# Altium PCB etapa_3.PcbDoc
Units mm, origin at the board's own origin, x right, y up, seen from the top; angles counter-clockwise.
Board outline 39 x 30.7 mm, 4 copper layers (Top Layer, Pot, S1, Bottom Layer); 129 components, 71 nets, 323 pads, 46 vias.
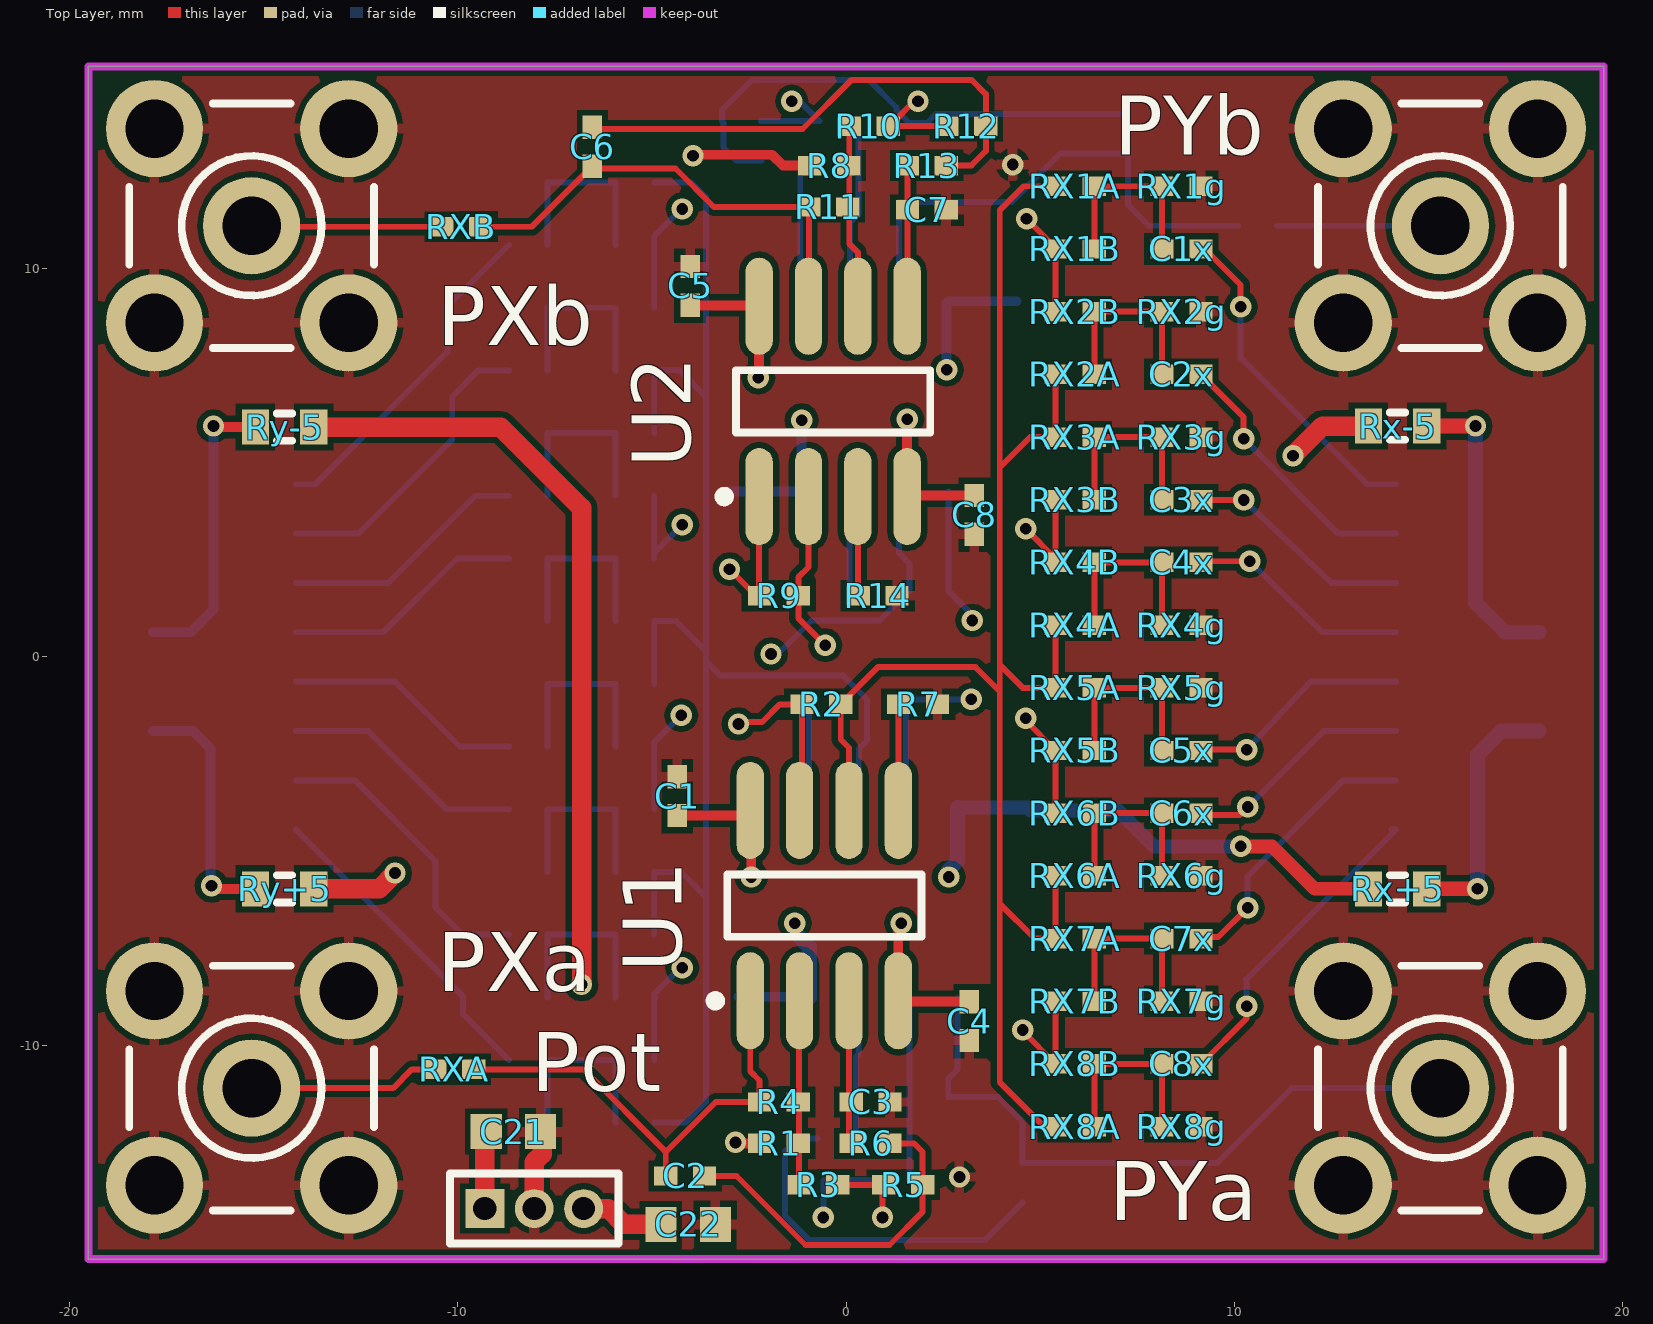
[diagram p0: Top Layer view]
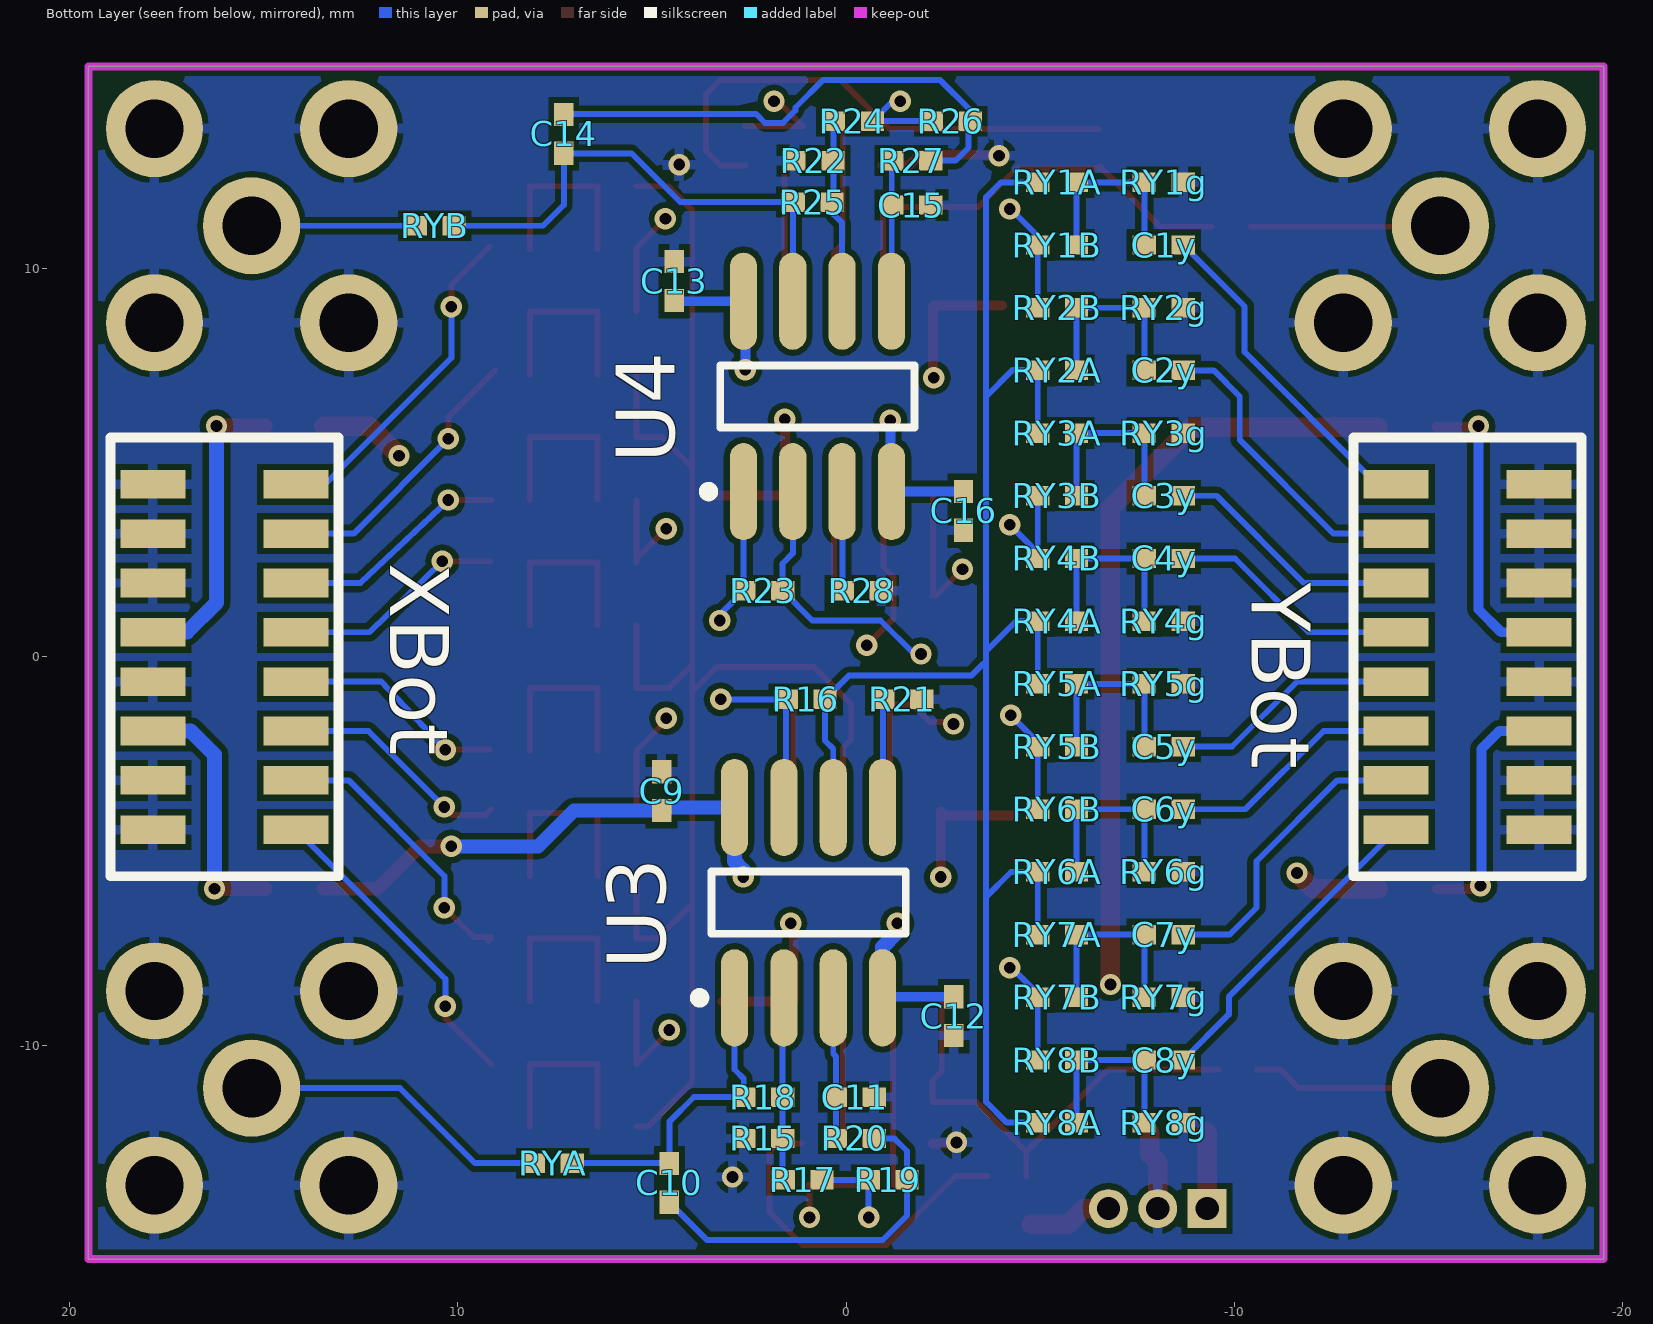
[diagram p1: Bottom Layer view, seen from below]
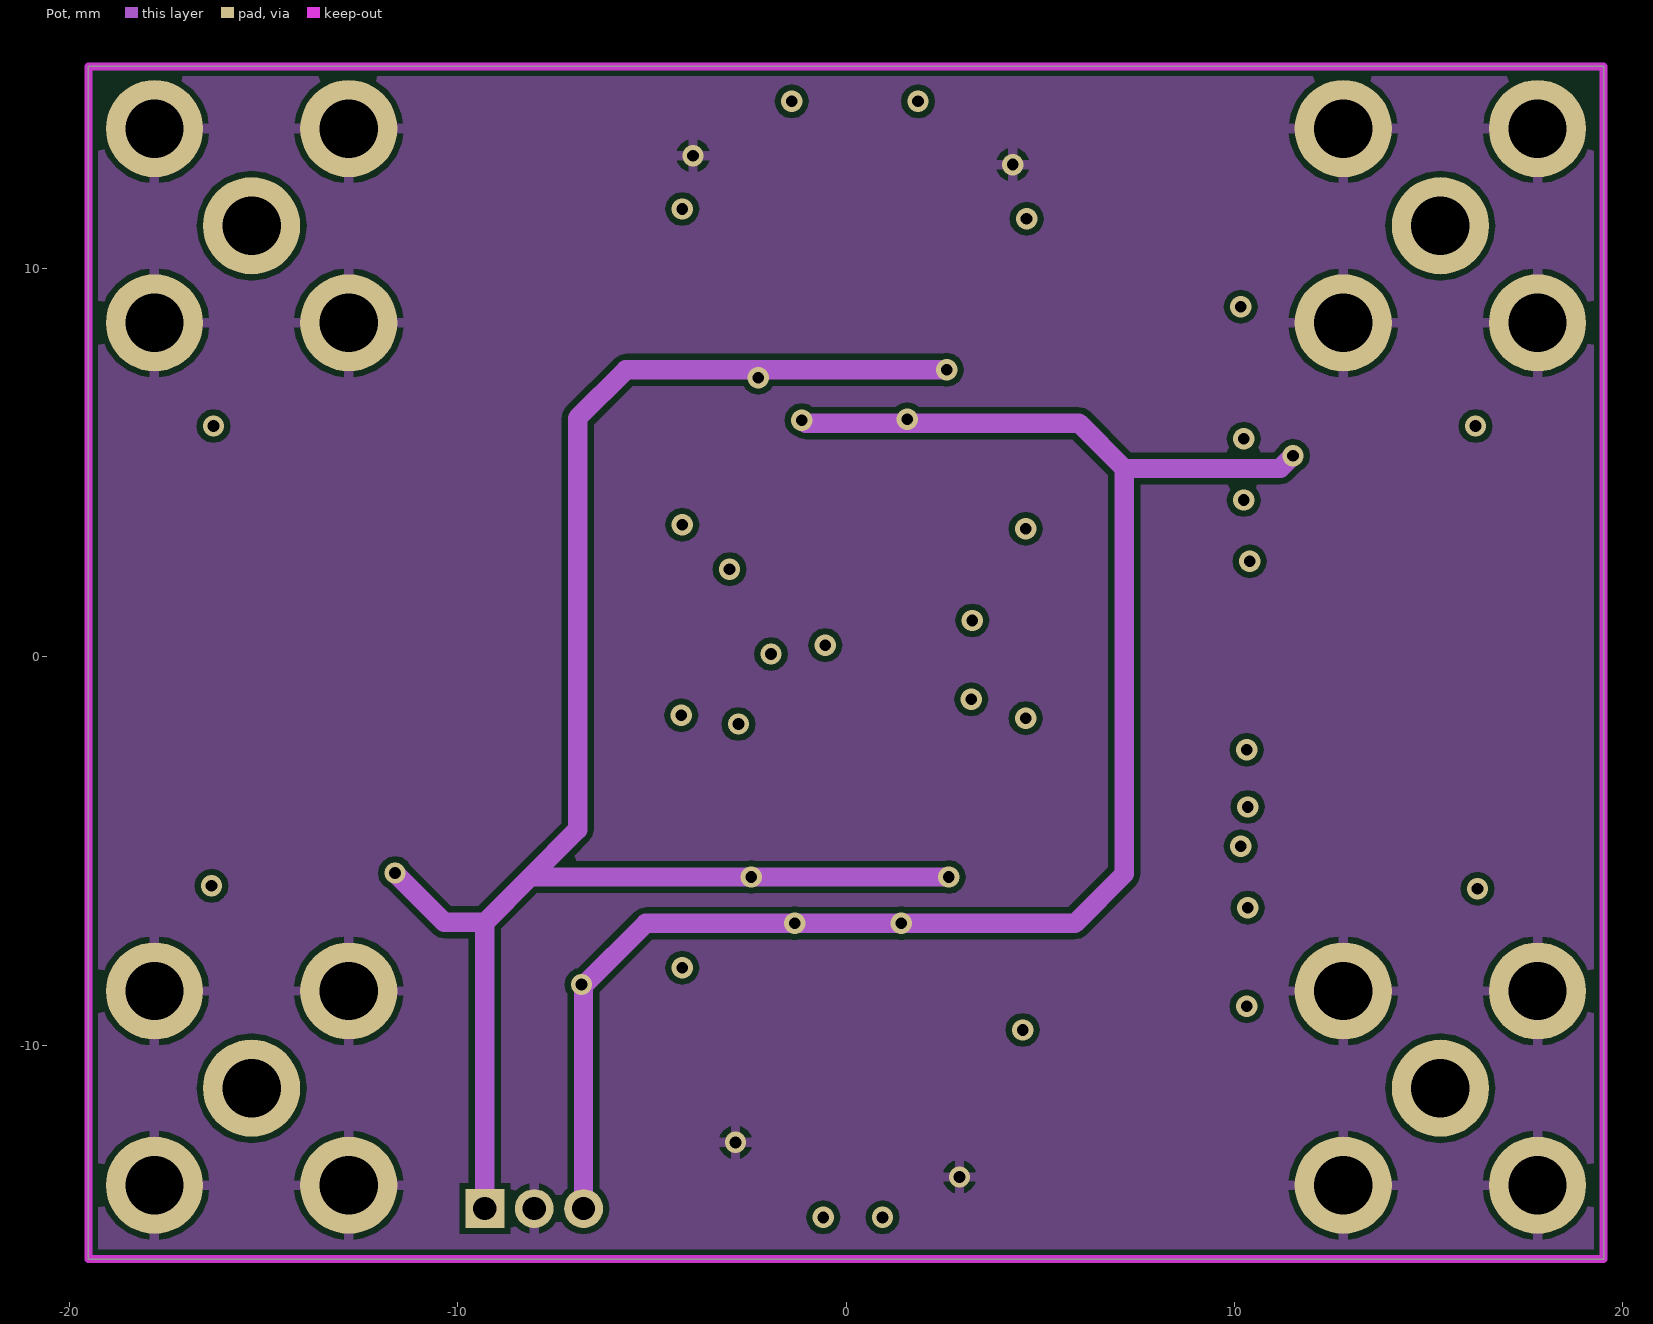
[diagram p2: Pot]
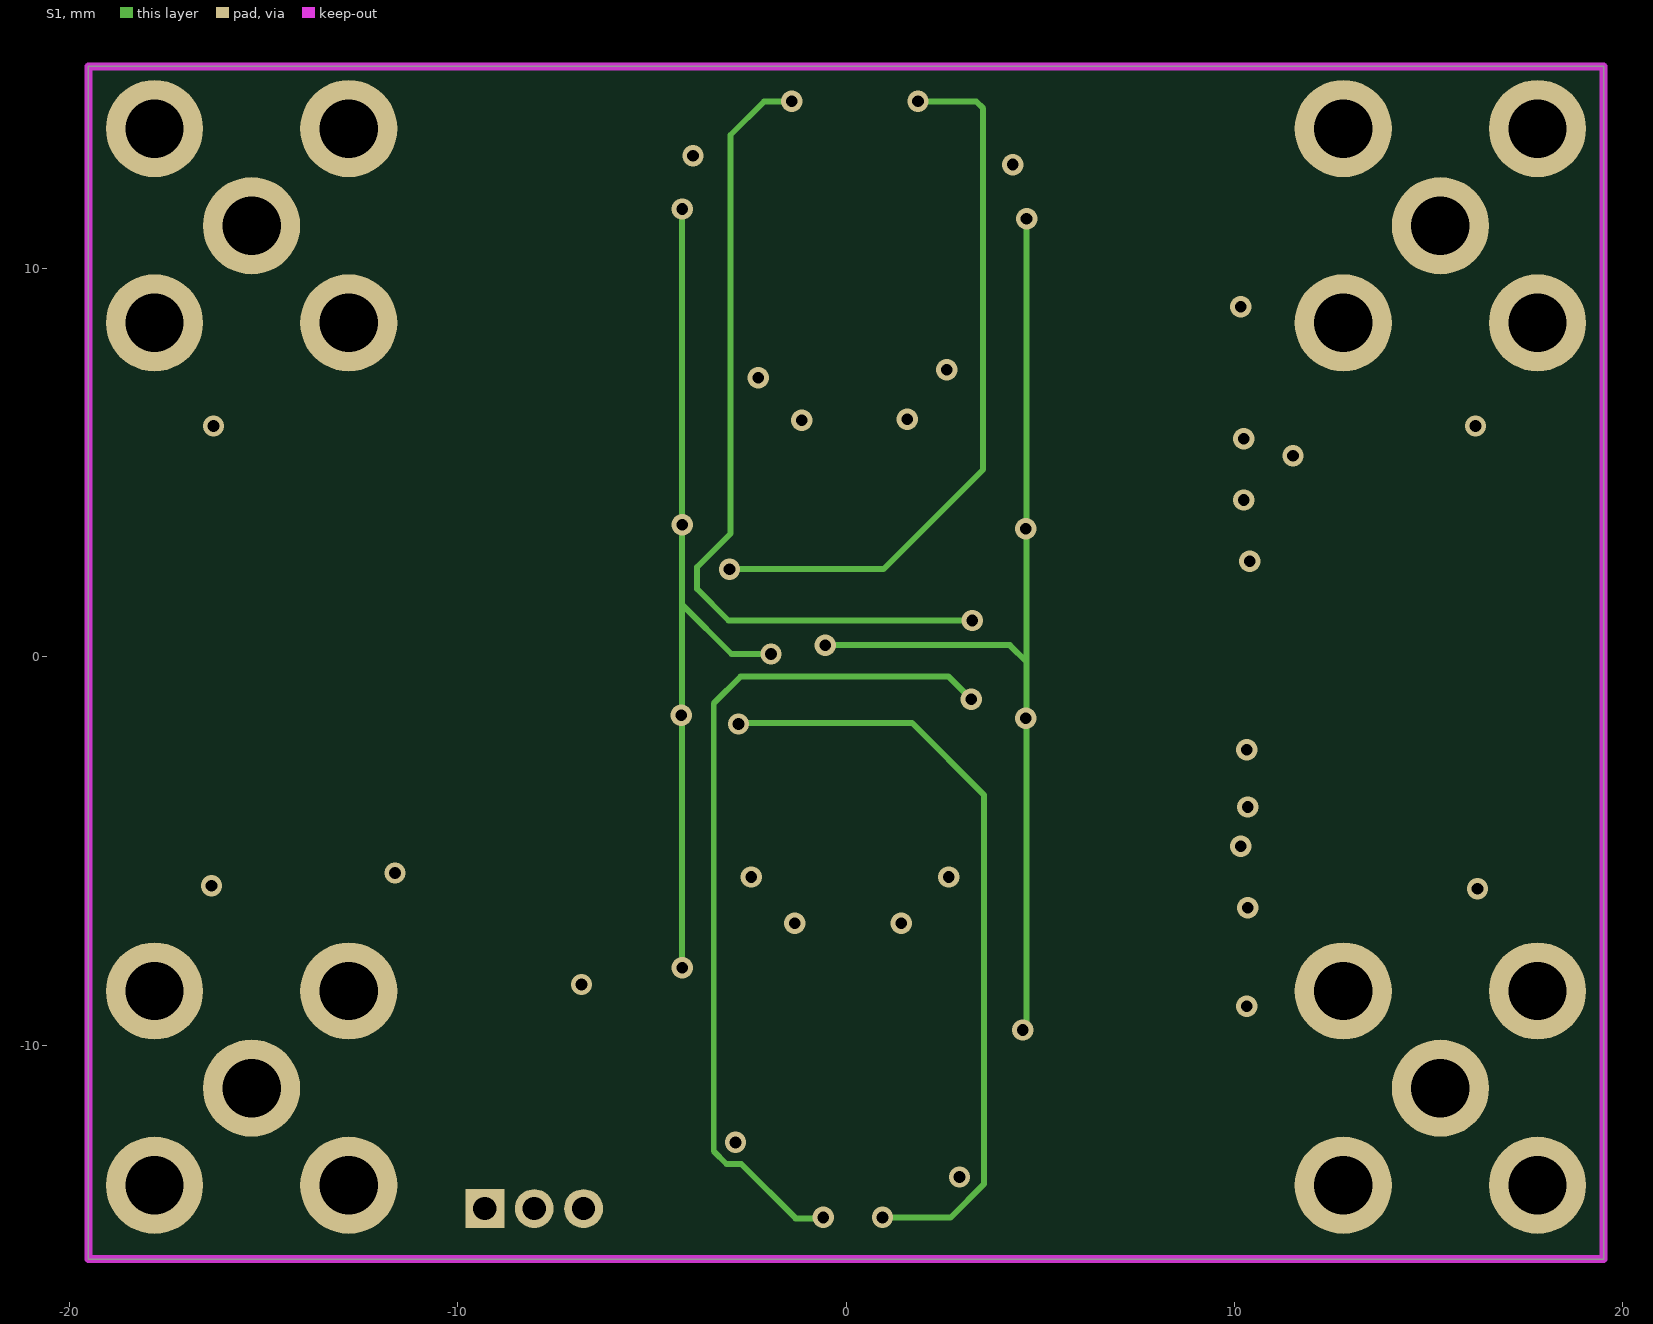
[diagram p3: S1]

## Layer stack, top to bottom
Top Solder: solder mask 0.0102, Solder Resist, Dk 3.5
Top Layer: signal copper 0.0356
Dielectric1: prepreg 0.32, FR-4, Dk 4.8
Pot: signal copper 0.0356
Dielectric2: core 0.32, FR-4, Dk 4.8
S1: signal copper 0.0356
Dielectric3: prepreg 0.32, FR-4, Dk 4.8
Bottom Layer: signal copper 0.0356
Bottom Solder: solder mask 0.0102, Solder Resist, Dk 3.5

## Board outline
-19.5,-15.5 -19.5,15.2 19.5,15.2 19.5,-15.5

## Design rules (kind name [scope] priority, off if disabled: settings)
Clearance Clearance_2 [InComponent('SiPM1')] p1: gap=0.15
Clearance Clearance_1 [IsTrack vs IsVia OR IsPad] p2: gap=0.203
Clearance [All] p3: gap=0.152
MinimumSolderMaskSliver MinimumSolderMaskSliver_1 [InComponent('SiPM1')] p1: minsoldermaskwidth=0.05
MinimumSolderMaskSliver [All] p2: minsoldermaskwidth=0.05
PasteMaskExpansion [InComponent('SiPM1')] p1: expansion=0
PlaneConnect PlaneConnect_1 [IsVia AND InNet('GND')] p1: planeconnectstyle=Direct reliefexpansion=0.508 reliefentries=4 reliefconductorwidth=0.254 reliefairgap=0.254
PlaneConnect [All] p2: planeconnectstyle=Relief reliefexpansion=0.508 reliefentries=4 reliefconductorwidth=0.254 reliefairgap=0.254
PolygonConnect [All] p1: connectstyle=Relief reliefconductorwidth=0.254 reliefentries=4 polygonreliefangle="90 Angle" airgapwidth=0.254
RoutingTopology [All] p1: topology=Daisy_Balanced
RoutingVias [All] p1: holewidth=0.3 width=0.6 viastyle="Through Hole" minholewidth=0.203 minwidth=0.406 maxholewidth=0.3 maxwidth=0.6
SilkToSilkClearance [All] p1: silktosilkclearance=0.127
SilkToSolderMaskClearance SilkscreenOverComponentPads_1 [HasFootprint('J1-0603')] p1: minsilkscreentomaskgap=0.1 clearancetoexposedcopper=TRUE
SilkToSolderMaskClearance SilkscreenOverComponentPads [IsPad] p2: minsilkscreentomaskgap=0.127 clearancetoexposedcopper=TRUE
SolderMaskExpansion SolderMaskExpansion_2 [(InComponent('SiPM1') OR InComponent('SiPM2') OR InComponent('SiPM3') OR InComponent('SiPM4'))] p1: expansion=0.05
SolderMaskExpansion SolderMaskExpansion_1 [IsVia] p2: expansion=0.051
SolderMaskExpansion [All] p3: expansion=0.051
Width Width_1 [(InNet('GND') OR InNet('+5') OR InNet('-5')OR InNet('-5_X')OR InNet('+5_X')OR InNet('-5_Y')OR InNet('+5_Y'))] p1: maxlimit=0.5 minlimit=0.1 preferedwidth=0.5 toplayer_prefwidth=0.305 midlayer1_minwidth=0.5 midlayer2_minwidth=0.254 midlayer2_maxwidth=0.381 midlayer2_prefwidth=0.305 bottomlayer_maxwidth=0.381 bottomlayer_prefwidth=0.305 minimp=50.000000 maximp=50.000000 favimp=50.000000
Width [All] p2: maxlimit=0.152 minlimit=0.152 preferedwidth=0.152 minimp=50.000000 maximp=50.000000 favimp=50.000000
24 further rules are at their usual default settings.

## Classes and differential pairs
component class etapa3_anger_X: C1 C1x C2 C2x C3 C3x C4 C4x C5 C5x C6 C6x C7 C7x C8 C8x C21 C22 Pot PXa PXb R1 R2 R3 R4 R5 R6 R7 R8 R9 R10 R11 R12 R13 R14 RX1A RX1B RX1g RX2A RX2B RX2g RX3A RX3B RX3g RX4A RX4B RX4g RX5A RX5B RX5g RX6A RX6B RX6g RX7A RX7B RX7g RX8A RX8B RX8g Rx+5 Rx-5 RXA RXB U1 U2 XBot
component class etapa3_anger_Y: C1y C2y C3y C4y C5y C6y C7y C8y C9 C10 C11 C12 C13 C14 C15 C16 PYa PYb R15 R16 R17 R18 R19 R20 R21 R22 R23 R24 R25 R26 R27 R28 RY1A RY1B RY1g RY2A RY2B RY2g RY3A RY3B RY3g RY4A RY4B RY4g RY5A RY5B RY5g RY6A RY6B RY6g RY7A RY7B RY7g RY8A RY8B RY8g Ry+5 Ry-5 RYA RYB U3 U4 YBot

## Components (designator, comment, footprint, x,y, rotation, side; value= is the part's Value field where it differs from the comment)
C1 "Cap" 0402 -4.343,-3.581 r90 top
C1x "Cap" 0402 8.636,10.502 r180 top
C1y "Cap" 0402 -8.179,10.604 r0 bottom
C2 "Cap" 0402 -4.14,-13.36 r180 top
C2x "Cap" 0402 8.636,7.275 r180 top
C2y "Cap" 0402 -8.179,7.376 r0 bottom
C3 "Cap" 0402 0.635,-11.455 r0 top
C3x "Cap" 0402 8.636,4.047 r180 top
C3y "Cap" 0402 -8.179,4.149 r0 bottom
C4 "Cap" 0402 3.175,-9.373 r90 top
C4x "Cap" 0402 8.636,2.433 r180 top
C4y "Cap" 0402 -8.179,2.535 r0 bottom
C5 "Cap" 0402 -4.013,9.55 r90 top
C5x "Cap" 0402 8.636,-2.408 r180 top
C5y "Cap" 0402 -8.179,-2.306 r0 bottom
C6 "Cap" 0402 -6.528,13.132 r270 top
C6x "Cap" 0402 8.636,-4.022 r180 top
C6y "Cap" 0402 -8.179,-3.92 r0 bottom
C7 "Cap" 0402 2.083,11.506 r0 top
C7x "Cap" 0402 8.636,-7.249 r180 top
C7y "Cap" 0402 -8.179,-7.148 r0 bottom
C8 "Cap" 0402 3.302,3.658 r90 top
C8x "Cap" 0402 8.636,-10.477 r180 top
C8y "Cap" 0402 -8.179,-10.375 r0 bottom
C9 "Cap" 0402 4.748,-3.454 r90 bottom
C10 "Cap" 0402 4.547,-13.538 r90 bottom
C11 "Cap" 0402 -0.231,-11.328 r180 bottom
C12 "Cap" 0402 -2.771,-9.246 r90 bottom
C13 "Cap" 0402 4.418,9.677 r90 bottom
C14 "Cap" 0402 7.264,13.462 r270 bottom
C15 "Cap" 0402 -1.678,11.633 r180 bottom
C16 "Cap" 0402 -3.025,3.759 r90 bottom
C21 "Cap Pol3" 1608[0603] -8.56,-12.217 r0 top
C22 "Cap Pol3" 1608[0603] -4.064,-14.605 r180 top
Pot "MHDR1X3" MHDR1X3 -9.296,-14.199 r0 top
PXa "SMA" SMB_V-RJ45 -15.3,-11.1 r0 top
PXb "SMA" SMB_V-RJ45 -15.3,11.1 r0 top
PYa "SMA" SMB_V-RJ45 15.3,-11.1 r0 top
PYb "SMA" SMB_V-RJ45 15.3,11.1 r0 top
R1 "Res3" 0402 -1.727,-12.522 r180 top
R2 "Res3" 0402 -0.635,-1.219 r0 top
R3 "Res3" 0402 -0.711,-13.589 r0 top
R4 "Res3" 0402 -1.727,-11.455 r0 top
R5 "Res3" 0402 1.473,-13.589 r180 top
R6 "Res3" 0402 0.635,-12.522 r0 top
R7 "Res3" 0402 1.854,-1.219 r0 top
R8 "Res3" 0402 -0.432,12.649 r180 top
R9 "Res3" 0402 -1.727,1.575 r0 top
R10 "Res3" 0402 0.584,13.665 r0 top
R11 "Res3" 0402 -0.457,11.582 r0 top
R12 "Res3" 0402 3.099,13.665 r180 top
R13 "Res3" 0402 2.083,12.649 r0 top
R14 "Res3" 0402 0.813,1.575 r0 top
R15 "Res3" 0402 2.132,-12.395 r0 bottom
R16 "Res3" 0402 1.039,-1.092 r180 bottom
R17 "Res3" 0402 1.116,-13.462 r180 bottom
R18 "Res3" 0402 2.132,-11.328 r180 bottom
R19 "Res3" 0402 -1.069,-13.462 r0 bottom
R20 "Res3" 0402 -0.231,-12.395 r180 bottom
R21 "Res3" 0402 -1.45,-1.092 r180 bottom
R22 "Res3" 0402 0.836,12.776 r0 bottom
R23 "Res3" 0402 2.132,1.702 r180 bottom
R24 "Res3" 0402 -0.18,13.792 r180 bottom
R25 "Res3" 0402 0.862,11.709 r180 bottom
R26 "Res3" 0402 -2.694,13.792 r0 bottom
R27 "Res3" 0402 -1.678,12.776 r180 bottom
R28 "Res3" 0402 -0.408,1.702 r180 bottom
RX1A "Res3" 0402 5.893,12.116 r0 top
RX1B "Res3" 0402 5.893,10.502 r0 top
RX1g "Res3" 0402 8.636,12.116 r180 top
RX2A "Res3" 0402 5.893,7.275 r0 top
RX2B "Res3" 0402 5.893,8.888 r0 top
RX2g "Res3" 0402 8.636,8.888 r180 top
RX3A "Res3" 0402 5.893,5.661 r0 top
RX3B "Res3" 0402 5.893,4.047 r0 top
RX3g "Res3" 0402 8.636,5.661 r180 top
RX4A "Res3" 0402 5.893,0.82 r0 top
RX4B "Res3" 0402 5.893,2.433 r0 top
RX4g "Res3" 0402 8.636,0.82 r180 top
RX5A "Res3" 0402 5.893,-0.794 r0 top
RX5B "Res3" 0402 5.893,-2.408 r0 top
RX5g "Res3" 0402 8.636,-0.794 r180 top
RX6A "Res3" 0402 5.893,-5.635 r0 top
RX6B "Res3" 0402 5.893,-4.022 r0 top
RX6g "Res3" 0402 8.636,-5.635 r180 top
RX7A "Res3" 0402 5.893,-7.249 r0 top
RX7B "Res3" 0402 5.893,-8.863 r0 top
RX7g "Res3" 0402 8.636,-8.863 r180 top
RX8A "Res3" 0402 5.893,-12.09 r0 top
RX8B "Res3" 0402 5.893,-10.477 r0 top
RX8g "Res3" 0402 8.636,-12.09 r180 top
Rx+5 "Res3" J1-0603 14.199,-5.969 r0 top
Rx-5 "Res3" J1-0603 14.199,5.944 r0 top
RXA "Res3" 0402 -10.084,-10.617 r0 top
RXB "Res3" 0402 -9.906,11.074 r0 top
RY1A "Res3" 0402 -5.436,12.217 r180 bottom
RY1B "Res3" 0402 -5.436,10.604 r180 bottom
RY1g "Res3" 0402 -8.179,12.217 r0 bottom
RY2A "Res3" 0402 -5.436,7.376 r180 bottom
RY2B "Res3" 0402 -5.436,8.99 r180 bottom
RY2g "Res3" 0402 -8.179,8.99 r0 bottom
RY3A "Res3" 0402 -5.436,5.762 r180 bottom
RY3B "Res3" 0402 -5.436,4.149 r180 bottom
RY3g "Res3" 0402 -8.179,5.762 r0 bottom
RY4A "Res3" 0402 -5.436,0.921 r180 bottom
RY4B "Res3" 0402 -5.436,2.535 r180 bottom
RY4g "Res3" 0402 -8.179,0.921 r0 bottom
RY5A "Res3" 0402 -5.436,-0.693 r180 bottom
RY5B "Res3" 0402 -5.436,-2.306 r180 bottom
RY5g "Res3" 0402 -8.179,-0.693 r0 bottom
RY6A "Res3" 0402 -5.436,-5.534 r180 bottom
RY6B "Res3" 0402 -5.436,-3.92 r180 bottom
RY6g "Res3" 0402 -8.179,-5.534 r0 bottom
RY7A "Res3" 0402 -5.436,-7.148 r180 bottom
RY7B "Res3" 0402 -5.436,-8.761 r180 bottom
RY7g "Res3" 0402 -8.179,-8.761 r0 bottom
RY8A "Res3" 0402 -5.436,-11.989 r180 bottom
RY8B "Res3" 0402 -5.436,-10.375 r180 bottom
RY8g "Res3" 0402 -8.179,-11.989 r0 bottom
Ry+5 "Res3" J1-0603 -14.453,-5.969 r180 top
Ry-5 "Res3" J1-0603 -14.453,5.918 r180 top
RYA "Res3" 0402 7.544,-13.03 r180 bottom
RYB "Res3" 0402 10.592,11.1 r180 bottom
U1 "THS4062" SO-8_M -0.559,-6.401 r90 top
U2 "THS4062" SO-8_M -0.33,6.579 r90 top
U3 "THS4062" SO-8_M 0.963,-6.325 r90 bottom
U4 "THS4062" SO-8_M 0.735,6.706 r90 bottom
XBot "FLE-108-01-XX-DV" FLE-108-01-XX-DV 16,0 r90 bottom
YBot "FLE-108-01-XX-DV" FLE-108-01-XX-DV -16,0 r270 bottom

## Footprints (in the part's own frame and the unit in brackets; to place one, negate y for a bottom-side part, rotate by r counter-clockwise, add the part's x,y. Pads: shape width x height; smd on the part's side, far side on the other; paste and mask are expansions set on the pad)
0402 [mm] "Chip Capacitor, Body 1.0x0.5mm, IPC High Density"
  rect 0.6x0.5 smd: 1(-0.5,0) 2(0.5,0)
  body extent -0.55,-0.3 0.55,0.3, height 1.3
1608[0603] [mm] "Chip Capacitor, Body 1.6x0.8mm, IPC High Density"
  rect 0.8x0.9 smd: 1(-0.7,0) 2(0.7,0)
  body extent -0.87,-0.48 0.87,0.48, height 1.3
FLE-108-01-XX-DV [mil]
  rect 29x66 smd mask+2: 1(-175,72.5) 2(-175,-72.5) 3(-125,72.5) 4(-125,-72.5) 5(-75,72.5) 6(-75,-72.5) 7(-25,72.5) 8(-25,-72.5) 9(25,72.5) 10(25,-72.5) 11(75,72.5) 12(75,-72.5) 13(125,72.5) 14(125,-72.5) 15(175,72.5) 16(175,-72.5)
  silkscreen extent -222,-116 222,116
J1-0603 [mm] "Chip Resistor, Body 1.6x0.8mm, IPC High Density"
  rect 0.7x0.9 smd: 1(-0.75,0) 2(0.75,0)
  silkscreen extent -0.2,-0.35 0.2,0.35, body extent -0.85,-0.48 0.85,0.48, height 0.9
MHDR1X3 [mm] "Connector; Header; 3 Position"
  rect 1x1 hole 0.6: 1(0,0)
  round 1 hole 0.6: 2(1.27,0) 3(2.54,0)
  silkscreen extent -0.9,-0.9 3.44,0.9
SMB_V-RJ45 [mm] "Connector; SMB Straight"
  round 2.5 hole 1.5: 1(0,0) 2(-2.5,-2.5) 2(-2.5,2.5) 2(2.5,-2.5) 2(2.5,2.5)
  silkscreen extent -3.15,-3.15 3.15,3.15
SO-8_M [mm] "SOIC, 8-Leads, Body 4.9x3.9mm, Pitch 1.27mm, IPC Low Density"
  oval 2.5x0.7 smd: 1(-2.45,1.905) 2(-2.45,0.635) 3(-2.45,-0.635) 4(-2.45,-1.905) 5(2.45,-1.905) 6(2.45,-0.635) 7(2.45,0.635) 8(2.45,1.905)
  silkscreen extent -2.57,-2.5 0.8,2.93, body extent -2,-2.5 2,2.5, height 1.75

## Part data
C1 C1x C1y C2 C2x C2y C3 C3x C3y C4 C4x C4y C5 C5x C5y C6 C6x C6y C7 C7x C7y C8 C8x C8y C9 C10 C11 C12 C13 C14 C15 C16: "Capacitor"
C21 C22: "Polarized Capacitor (Surface Mount)"
Pot: "Header, 3-Pin"
PXa PXb PYa PYb: library part SMB, "SMB Straight Connector"
R1 R2 R3 R4 R5 R6 R7 R8 R9 R10 R11 R12 R13 R14 R15 R16 R17 R18 R19 R20 R21 R22 R23 R24 R25 R26 R27 R28 RX1A RX1B RX1g RX2A RX2B RX2g RX3A RX3B RX3g RX4A RX4B RX4g RX5A RX5B RX5g RX6A RX6B RX6g RX7A RX7B RX7g RX8A RX8B RX8g Rx+5 Rx-5 RXA RXB RY1A RY1B RY1g RY2A RY2B RY2g RY3A RY3B RY3g RY4A RY4B RY4g RY5A RY5B RY5g RY6A RY6B RY6g RY7A RY7B RY7g RY8A RY8B RY8g Ry+5 Ry-5 RYA RYB: "Resistor"
U1 U2 U3 U4: library part AD8002AR, "Dual 600MHz, 50mW Current Feedback Amplifier"
XBot YBot: "DUAL ROW 0.050'' STRIP ASSEMBLY."

## Via types
v1: diameter 0.55, hole 0.3, Top Layer to Bottom Layer, 46 vias

## Nets (pads, with @x,y where several pads share a name; then routed paths per layer and width w, separated by ;. In a path a pad name is that pad's centre, name@x,y a point inside that pad or via, vN(x,y) a via of type N, cw(c..) or ccw(c..) an arc to the next point about the centre after c; other vN are vias at no path point)
+5: C1.1 C5.1 C9.1 C13.1 C21.1 Pot.1 Rx+5.1 Ry+5.1 U1.8 U2.8 U3.8 U4.8 | length 73.2
  Top Layer w0.152: U1.8@-2.594,-4.081 U1.8 U1.8@-2.438,-3.976 ; v1@-2.261,7.391 v1@-2.235,7.417
  Top Layer w0.254: C1.1 U1.8@-2.594,-4.081 ; C5.1 U2.8@-2.257,9.05 ; v1(-2.438,-5.664) U1.8@-2.438,-3.976 ; v1@-2.235,7.417 U2.8
  Top Layer w0.354: v1(10.16,-4.877) 10.973,-4.877 12.065,-5.969 Rx+5.1
  Top Layer w0.5: Ry+5.1 -12.014,-5.969 v1(-11.608,-5.563) ; Pot.1 -9.296,-12.254 C21.1
  Pot w0.5: v1(-11.608,-5.563) -10.338,-6.833 -9.296,-6.833 ; Pot.1 -9.296,-6.833 ; v1(2.591,7.391) -5.664,7.391 -6.909,6.147 -6.909,-4.445 -8.128,-5.664 ; v1(2.642,-5.664) v1(-2.438,-5.664) -8.128,-5.664 ; -9.296,-6.833 -8.128,-5.664
  Bottom Layer w0.152: U4.8@2.591,9.107 U4.8 ; C13.1@4.396,9.156 C13.1 ; C9.1@4.668,-3.875 C9.1
  Bottom Layer w0.254: v1(2.591,7.391) U4.8@2.591,9.107 ; U4.8 C13.1@4.396,9.156
  Bottom Layer w0.354: U3.8 C9.1@4.668,-3.875 ; C9.1 7.002,-3.954 7.925,-4.877 v1(10.16,-4.877)
  Bottom Layer w0.381: v1(2.642,-5.664) 2.642,-5.486 2.868,-5.26 U3.8
  other v1: -2.261,7.188
+5_X: Rx+5.2 XBot.5 | length 6.6
  Top Layer w0.381: Rx+5.2 v1(16.256,-5.969)
  Bottom Layer w0.381: v1(16.256,-5.969) 16.256,-2.515 16.866,-1.905 XBot.5
+5_Y: Ry+5.2 YBot.11 | length 6.4
  Top Layer w0.254: v1(-16.332,-5.893) -16.256,-5.969 Ry+5.2
  Bottom Layer w0.254: YBot.11 -16.815,-1.905 -16.358,-2.362 v1@-16.358,-5.893
-5: C4.2 C8.2 C12.2 C16.2 C22.2 Pot.3 Rx-5.1 Ry-5.1 U1.4 U2.4 U3.4 U4.4 | length 84.2
  Top Layer w0.152: v1@1.346,-6.934 v1(1.422,-6.858)
  Top Layer w0.254: U1.4 v1@1.346,-6.934 ; U1.4@1.368,-8.873 C4.2 ; U2.4 v1(1.575,6.121) ; U2.4@1.604,4.158 C8.2
  Top Layer w0.5: Ry-5.1 -8.89,5.918 -6.807,3.835 v1(-6.807,-8.433) ; Pot.3 -6.121,-14.199 -5.715,-14.605 C22.2 ; v1(11.506,5.182) 12.268,5.944 Rx-5.1
  Pot w0.5: Pot.3 -6.756,-8.458 -5.156,-6.858 v1(-1.321,-6.858) v1(1.422,-6.858) 5.893,-6.858 7.163,-5.588 7.163,4.851 ; v1@-1.041,6.02 5.994,6.02 7.163,4.851 ; v1(11.506,5.182) 11.176,4.851 7.163,4.851
  Bottom Layer w0.152: C16.2 C16.2@-3.021,4.256 ; U3.4@-0.971,-8.746 U3.4
  Bottom Layer w0.254: C16.2@-3.021,4.256 U4.4 ; C12.2 U3.4@-0.971,-8.746 ; U4.4@-1.143,4.064 v1(-1.143,6.096)
  Bottom Layer w0.381: v1(-1.321,-6.858) -1.321,-7.087 -0.942,-7.466 U3.4
-5_X: Rx-5.2 XBot.9 | length 7.8
  Top Layer w0.381: Rx-5.2 v1(16.205,5.944)
  Bottom Layer w0.381: v1(16.205,5.944) 16.205,1.397 16.967,0.635 XBot.9
-5_Y: Ry-5.2 YBot.7 | length 7.6
  Top Layer w0.254: v1(-16.281,5.944) -16.256,5.918 Ry-5.2
  Bottom Layer w0.254: YBot.7 -16.866,0.635 -16.281,1.219 v1(-16.281,5.944)
GND: C1.2 C3.2 C4.1 C5.2 C7.2 C8.1 C9.2 C11.2 C12.1 C13.2 C15.2 C16.1 C21.2 C22.1 Pot.2 PXa.2 PXb.2 PYa.2 PYb.2 R1.2 R7.2 R8.2 R14.2 R15.2 R21.2 R22.2 R28.2 RX1g.1 RX2g.1 RX3g.1 RX4g.1 RX5g.1 RX6g.1 RX7g.1 RX8g.1 RY1g.1 RY2g.1 RY3g.1 RY4g.1 RY5g.1 RY6g.1 RY7g.1 RY8g.1 XBot.1 XBot.3 XBot.7 XBot.11 XBot.13 XBot.15 YBot.1 YBot.3 YBot.5 YBot.9 YBot.13 YBot.15 | length 5.9
  Top Layer w0.254: C21.2 C21.2@-7.823,-12.254 ; v1(-3.937,12.903) -3.912,12.929 -1.905,12.929 -1.626,12.649 R8.2 ; v1@-2.896,-12.522 R1.2
  Top Layer w0.5: Pot.2 -8.026,-13.005 -7.823,-12.802 C21.2@-7.823,-12.254
  other v1: 2.921,-13.386 -2.845,-12.497 4.293,12.675
NetC1x_1: C1x.1 XBot.16 | length 8.6
  Top Layer w0.152: C1x.1@9.185,10.551 10.16,9.576 v1(10.16,9.017)
  Bottom Layer w0.152: v1(10.16,9.017) 10.16,7.696 13.411,4.445 XBot.16
NetC1x_2: C1x.2 RX1A.2 RX1B.2 RX1g.2 | length 5
  Top Layer w0.152: RX1B.2 RX1A.2 RX1g.2 C1x.2
NetC1y_1: C1y.1 YBot.2 | length 8.7
  Bottom Layer w0.152: YBot.2 -13.665,4.445 -10.262,7.849 -10.262,9.021 C1y.1
NetC1y_2: C1y.2 RY1A.2 RY1B.2 RY1g.2 | length 5
  Bottom Layer w0.152: C1y.2 RY1g.2 RY1A.2 RY1B.2
NetC2_1: C2.1 R5.1 R6.2 | length 9.2
  Top Layer w0.152: C2.1 -2.819,-13.36 -1.041,-15.138 1.118,-15.138 1.973,-14.283 R5.1 1.973,-12.743 1.753,-12.522 R6.2
NetC2_2: C2.2 R4.1 RXA.2 U1.1 | length 12.1
  Top Layer w0.152: RXA.2 -6.756,-10.617 -4.64,-12.733 -4.64,-12.743 ; C2.2 -4.64,-12.743 ; U1.1 -2.464,-10.668 -2.227,-10.905 R4.1 -3.353,-11.455 -4.64,-12.743
NetC2x_1: C2x.1 XBot.14 | length 7.2
  Top Layer w0.152: C2x.1@9.032,7.376 10.236,6.172 v1(10.236,5.613)
  Bottom Layer w0.152: v1(10.236,5.613) 12.675,3.175 XBot.14
NetC2x_2: C2x.2 RX2A.2 RX2B.2 RX2g.2 | length 5
  Top Layer w0.152: RX2A.2 RX2B.2 RX2g.2 C2x.2
NetC2y_1: C2y.1 YBot.4 | length 7.9
  Bottom Layer w0.152: YBot.4 -12.548,3.175 -10.135,5.588 -10.135,6.706 -9.464,7.376 C2y.1
NetC2y_2: C2y.2 RY2A.2 RY2B.2 RY2g.2 | length 5
  Bottom Layer w0.152: C2y.2 RY2g.2 RY2B.2 RY2A.2
NetC3_1: C3.1 R6.1 U1.3 | length 3.7
  Top Layer w0.152: U1.3 0.076,-12.463 R6.1
NetC3x_1: C3x.1 XBot.12 | length 5.9
  Top Layer w0.152: C3x.1@9.136,4.039 v1(10.236,4.039)
  Bottom Layer w0.152: v1(10.236,4.039) 12.497,1.905 XBot.12
NetC3x_2: C3x.2 RX3A.2 RX3B.2 RX3g.2 | length 5
  Top Layer w0.152: RX3B.2 RX3A.2 RX3g.2 C3x.2
NetC3y_1: C3y.1 YBot.6 | length 6.4
  Bottom Layer w0.152: YBot.6 -11.786,1.905 -9.542,4.149 C3y.1
NetC3y_2: C3y.2 RY3A.2 RY3B.2 RY3g.2 | length 5
  Bottom Layer w0.152: C3y.2 RY3g.2 RY3A.2 RY3B.2
NetC4x_1: C4x.1 XBot.10 | length 5.7
  Top Layer w0.152: C4x.1@9.161,2.464 v1(10.389,2.464)
  Bottom Layer w0.152: v1(10.389,2.464) 12.268,0.635 XBot.10
NetC4x_2: C4x.2 RX4A.2 RX4B.2 RX4g.2 | length 5
  Top Layer w0.152: RX4A.2 RX4B.2 C4x.2 RX4g.2
NetC4y_1: C4y.1 YBot.8 | length 6.3
  Bottom Layer w0.152: YBot.8 -11.913,0.635 -10.013,2.535 C4y.1
NetC4y_2: C4y.2 RY4A.2 RY4B.2 RY4g.2 | length 5
  Bottom Layer w0.152: RY4g.2 C4y.2 RY4B.2 RY4A.2
NetC5x_1: C5x.1 XBot.8 | length 5.8
  Top Layer w0.152: C5x.1@9.161,-2.388 v1(10.312,-2.388)
  Bottom Layer w0.152: v1(10.312,-2.388) 11.963,-0.635 XBot.8
NetC5x_2: C5x.2 RX5A.2 RX5B.2 RX5g.2 | length 5
  Top Layer w0.152: RX5B.2 RX5A.2 RX5g.2 C5x.2
NetC5y_1: C5y.1 YBot.10 | length 6.2
  Bottom Layer w0.152: YBot.10 -11.608,-0.635 -9.936,-2.306 C5y.1
NetC5y_2: C5y.2 RY5A.2 RY5B.2 RY5g.2 | length 5
  Bottom Layer w0.152: C5y.2 RY5g.2 RY5A.2 RY5B.2
NetC6_1: C6.1 R12.1 R13.2 | length 13.4
  Top Layer w0.152: C6.1@-6.502,13.589 -1.118,13.589 0.148,14.855 3.23,14.855 3.599,14.486 R12.1 3.599,13.022 3.226,12.649 R13.2
NetC6_2: C6.2 R11.1 RXB.2 U2.7 | length 12.1
  Top Layer w0.152: RXB.2 -8.085,11.074 C6.2 ; C6.2@-6.528,12.573 -4.391,12.573 -3.4,11.582 R11.1 -0.957,9.037 U2.7
NetC6x_1: C6x.1 XBot.6 | length 6
  Top Layer w0.152: C6x.1@9.136,-3.92 9.28,-4.064 10.135,-4.064 v1(10.338,-3.861)
  Bottom Layer w0.152: v1(10.338,-3.861) 12.294,-1.905 XBot.6
NetC6x_2: C6x.2 RX6A.2 RX6B.2 RX6g.2 | length 5
  Top Layer w0.152: RX6A.2 RX6B.2 C6x.2 RX6g.2
NetC6y_1: C6y.1 YBot.12 | length 6.3
  Bottom Layer w0.152: YBot.12 -12.294,-1.905 -10.279,-3.92 C6y.1
NetC6y_2: C6y.2 RY6A.2 RY6B.2 RY6g.2 | length 5
  Bottom Layer w0.152: RY6g.2 C6y.2 RY6B.2 RY6A.2
NetC7_1: C7.1 R13.1 U2.5 | length 3.6
  Top Layer w0.152: U2.5 1.583,9.037 C7.1 R13.1
NetC7x_1: C7x.1 XBot.4 | length 7.3
  Top Layer w0.152: C7x.1 C7x.1@9.202,-7.315 ; C7x.1@9.136,-7.214 9.576,-7.214 v1(10.338,-6.452)
  Bottom Layer w0.152: v1(10.338,-6.452) 10.338,-5.639 12.802,-3.175 XBot.4
NetC7x_2: C7x.2 RX7A.2 RX7B.2 RX7g.2 | length 5
  Top Layer w0.152: RX7B.2 RX7A.2 C7x.2 RX7g.2
NetC7y_1: C7y.1 YBot.14 | length 7.8
  Bottom Layer w0.152: YBot.14 -12.649,-3.175 -10.566,-5.258 -10.566,-6.452 -9.87,-7.148 C7y.1
NetC7y_2: C7y.2 RY7A.2 RY7B.2 RY7g.2 | length 5
  Bottom Layer w0.152: RY7g.2 C7y.2 RY7A.2 RY7B.2
NetC8x_1: C8x.1 XBot.2 | length 8.2
  Top Layer w0.152: C8x.1 10.312,-9.3 v1(10.312,-8.992)
  Bottom Layer w0.152: v1(10.312,-8.992) 10.312,-8.291 XBot.2 XBot.2@14.037,-4.445
NetC8x_2: C8x.2 RX8A.2 RX8B.2 RX8g.2 | length 5
  Top Layer w0.152: RX8A.2 RX8B.2 C8x.2 RX8g.2
NetC8y_1: C8y.1 YBot.16 | length 8.2
  Bottom Layer w0.152: YBot.16 -9.855,-8.748 -9.855,-9.199 C8y.1
NetC8y_2: C8y.2 RY8A.2 RY8B.2 RY8g.2 | length 5
  Bottom Layer w0.152: RY8g.2 C8y.2 RY8B.2 RY8A.2
NetC10_1: C10.1 R19.1 R20.2 | length 9.4
  Bottom Layer w0.152: R20.2 -1.245,-12.395 -1.569,-12.719 R19.1 -1.569,-14.382 -0.94,-15.011 3.573,-15.011 C10.1
NetC10_2: C10.2 R18.1 RYA.2 U3.1 | length 8.4
  Bottom Layer w0.152: U3.1 2.868,-10.619 2.632,-10.856 R18.1 3.912,-11.328 4.547,-11.963 C10.2 4.555,-13.03 RYA.2
NetC11_1: C11.1 R20.1 U3.3 | length 3.7
  Bottom Layer w0.152: R20.1 0.254,-12.38 0.254,-10.287 0.328,-10.213 U3.3
NetC14_1: C14.1 R26.1 R27.2 | length 13.4
  Bottom Layer w0.152: R27.2 -2.819,12.776 -3.154,13.111 -3.154,13.752 R26.1 -3.194,14.078 -2.417,14.855 0.589,14.855 1.3,14.143 1.3,14.071 1.625,13.746 2.084,13.746 2.312,13.974 C14.1@7.239,13.974
NetC14_2: C14.2 R25.1 RYB.2 U4.7 | length 13.4
  Bottom Layer w0.152: U4.7 1.362,9.164 R25.1 4.267,11.709 5.52,12.962 C14.2 7.264,11.633 7.798,11.1 RYB.2
NetC15_1: C15.1 R27.1 U4.5 | length 3.6
  Bottom Layer w0.152: R27.1 C15.1 -1.178,9.164 U4.5
NetPXa_1: PXa.1 RXA.1 | length 4.9
  Top Layer w0.152: PXa.1 -11.659,-11.1 -11.176,-10.617 RXA.1
NetPXb_1: PXb.1 RXB.1 | length 4.9
  Top Layer w0.152: PXb.1 -15.274,11.074 RXB.1
NetPYa_1: PYa.1 RYA.1 | length 8.1
  Bottom Layer w0.152: RYA.1 9.55,-13.03 11.481,-11.1 PYa.1
NetPYb_1: PYb.1 RYB.1 | length 4.2
  Bottom Layer w0.152: RYB.1 PYb.1
NetR1_1: R1.1 R3.1 R4.2 U1.2 | length 4.7
  Top Layer w0.152: R3.1 -1.211,-11.455 -1.211,-8.868 U1.2
NetR2_1: R2.1 R3.2 R5.2 U1.7 | length 26.8
  Top Layer w0.152: v1@-2.921,-1.676 -2.159,-1.676 -1.702,-1.219 R2.1 -1.135,-3.892 U1.7 ; R3.2 R5.2@0.906,-13.589 ; v1(0.94,-14.427) 0.94,-13.622 R5.2@0.906,-13.589 ; R5.2 R5.2@0.906,-13.589
  S1 w0.152: v1@-2.769,-1.702 1.702,-1.702 3.556,-3.556 3.556,-13.564 2.692,-14.427 v1(0.94,-14.427)
  other v1: -2.769,-1.727
NetR2_2: R2.2 RX1A.1 RX2A.1 RX3A.1 RX4A.1 RX5A.1 RX6A.1 RX7A.1 RX8A.1 U1.6 | length 43.7
  Top Layer w0.152: U1.6 0.076,-2.337 -0.135,-2.126 R2.2 0.821,-0.263 3.332,-0.263 3.958,-0.889 ; RX8A.1 5.105,-12.09 3.958,-10.943 3.958,-6.35 ; RX6A.1 RX7A.1 4.858,-7.249 3.958,-6.35 ; RX4A.1 RX5A.1 4.549,-0.794 3.958,-0.203 ; RX2A.1 RX3A.1 4.742,5.661 3.958,4.877 ; RX1A.1 4.572,12.116 3.958,11.502 3.958,4.877 ; 3.958,-6.35 3.958,-0.889 ; 3.958,-0.889 3.958,-0.203 ; 3.958,-0.203 3.958,4.877
NetR7_1: R7.1 U1.5 | length 2.7
  Top Layer w0.152: U1.5 1.354,-3.943 R7.1
NetR8_1: R8.1 R10.1 R11.2 U2.6 | length 5
  Top Layer w0.152: U2.6@0.084,9.249 U2.6 0.305,10.414 0.084,10.635 R10.1
NetR9_1: R9.1 R10.2 R12.2 U2.1 | length 24.9
  Top Layer w0.152: v1(-2.997,2.261) -2.319,1.583 R9.1@-2.235,1.583 ; U2.1 R9.1@-2.235,1.583 ; R9.1 R9.1@-2.235,1.583 ; v1(1.854,14.3) 1.854,14.41 1.11,13.665 R12.2
  S1 w0.152: v1(-2.997,2.261) 0.965,2.261 3.531,4.826 3.531,14.122 3.353,14.3 v1(1.854,14.3)
NetR9_2: R9.2 RX1B.1 RX2B.1 RX3B.1 RX4B.1 RX5B.1 RX6B.1 RX7B.1 RX8B.1 U2.2 | length 41.5
  Top Layer w0.152: U2.2 -0.965,2.311 -1.227,2.049 R9.2 -1.227,0.999 v1(-0.533,0.305) ; v1(4.547,-9.601) 4.547,-9.63 RX8B.1 RX7B.1 ; v1(4.623,-1.575) 4.623,-1.638 RX5B.1 RX6B.1 ; v1(4.623,3.302) RX4B.1@5.393,2.532 ; v1(4.648,11.278) 5.393,10.533 RX1B.1 RX2B.1 ; RX4B.1 RX4B.1@5.393,2.532 ; RX3B.1 RX4B.1@5.393,2.532
  S1 w0.152: v1(-0.533,0.305) 4.216,0.305 4.648,-0.127 ; v1(4.547,-9.601) 4.648,-9.5 4.648,-0.127 ; v1(4.648,11.278) 4.648,-0.127
NetR14_1: R14.1 U2.3 | length 2.5
  Top Layer w0.152: R14.1@0.305,1.583 U2.3
NetR15_1: R15.1 R17.1 R18.2 U3.2 | length 4.7
  Bottom Layer w0.152: U3.2 1.632,-8.808 R18.2 R15.1 1.632,-13.446 R17.1
NetR16_1: R16.1 R17.2 R19.2 U3.7 | length 28.9
  S1 w0.152: v1@-0.584,-14.453 -1.295,-14.453 -2.697,-13.051 -3.074,-13.051 -3.404,-12.722 -3.404,-1.194 -2.718,-0.508 2.642,-0.508 v1(3.226,-1.092)
  Bottom Layer w0.152: v1(-0.584,-14.427) -0.584,-13.477 R19.2 R17.2 ; U3.7 1.539,-3.816 R16.1 v1(3.226,-1.092)
NetR16_2: R16.2 RY1A.1 RY2A.1 RY3A.1 RY4A.1 RY5A.1 RY6A.1 RY7A.1 RY8A.1 U3.6 | length 43.3
  Bottom Layer w0.152: RY8A.1 -4.14,-11.989 -3.607,-11.455 -3.607,-6.172 ; RY7A.1 RY6A.1 -4.245,-5.534 -3.607,-6.172 ; RY5A.1 RY4A.1 -4.376,0.921 -3.607,0.152 ; RY3A.1 RY2A.1 -4.92,7.391 -4.293,7.391 -3.607,6.706 ; RY1A.1 -3.988,12.217 -3.607,11.836 -3.607,6.706 ; -3.531,-0.178 -3.226,-0.483 -0.07,-0.483 R16.2 0.539,-2.153 0.328,-2.364 U3.6 ; -3.607,-6.172 -3.607,0.152 ; -3.607,0.152 -3.607,6.706
NetR21_1: R21.1 U3.5 | length 2.8
  Bottom Layer w0.152: R21.1 -0.95,-3.867 U3.5
NetR22_1: R22.1 R24.1 R25.2 U4.6 | length 4.7
  Bottom Layer w0.152: U4.6 0.1,11.174 0.32,11.395 R24.1
NetR23_1: R23.1 R24.2 R26.2 U4.1 | length 27.4
  S1 w0.152: v1(-1.397,14.3) -2.108,14.3 -2.972,13.437 -2.972,3.175 -3.835,2.311 -3.835,1.753 -3.023,0.94 v1(3.251,0.94)
  Bottom Layer w0.152: R26.2 R24.2 -1.188,14.3 v1(-1.397,14.3) ; U4.1 2.64,1.71 R23.1 3.251,1.082 v1(3.251,0.94)
NetR23_2: R23.2 RY1B.1 RY2B.1 RY3B.1 RY4B.1 RY5B.1 RY6B.1 RY7B.1 RY8B.1 U4.2 | length 40.1
  S1 w0.152: v1(-4.216,-8.001) -4.216,1.346 ; v1(-4.216,11.532) v1(-4.216,3.404) -4.216,1.346 ; v1(-1.93,0.076) -2.946,0.076 -4.216,1.346
  Bottom Layer w0.152: RY8B.1 RY7B.1 ; RY6B.1 RY5B.1 -4.936,-2.192 v1@-4.267,-1.524 ; RY4B.1 RY4B.1@-4.936,2.684 ; RY3B.1 RY4B.1@-4.936,2.684 ; RY2B.1 RY1B.1 -4.936,10.838 v1@-4.242,11.532 ; RY7B.1@-4.901,-8.761 RY7B.1 ; v1@-4.267,-8.001 -4.936,-8.669 RY7B.1 ; v1(-4.216,3.404) RY4B.1@-4.936,2.684 ; v1(-1.93,0.076) -1.753,0.076 -0.889,0.94 0.87,0.94 R23.2 1.632,2.407 1.37,2.669 U4.2
  other v1: -4.242,-1.499
NetR28_1: R28.1 U4.3 | length 2.6
  Bottom Layer w0.152: R28.1 0.092,4.248 U4.3

## Polygon pours and split planes (outlines as drawn)
GND on Bottom Layer "gnd_bot" (solid, remove dead copper, pour order 15): -19.5,15.2 -19.5,-15.5 19.5,-15.5 19.5,15.2
GND on Top Layer "gnd_top" (solid, remove dead copper, pour order 13): -19.5,15.2 -19.5,-15.5 19.5,-15.5 19.5,15.2
GND on Pot "gnd_pot" (solid, remove dead copper, pour order 14): -19.5,15.2 -19.5,-15.5 19.5,-15.5 19.5,15.2

## Keep-outs
Keep-Out Layer:
  the board outline again, w0.2

## Text inside footprints (layer, text, board x,y; h text height)
XBot: Mechanical 1 "J1" at 15.492,-0.497 h0.76 r270
YBot: Mechanical 1 "J1" at -15.492,0.497 h0.76 r90